# EAGLE board Power_Distro_PCB (EAGLE 8.3.2)

Size 160 x 100 mm. Coordinates in mm from the lower left corner, seen from the top.
Outline: 0,0 160,0 160,100 0,100 0,0
Copper layers (1*16): Top 0.035mm / dielectric 1.5mm / Bottom 0.035mm
Design rules "default": minimum track width 6mil, minimum drill 0.35mm, track to track 6mil, track to pad 6mil, pad to pad 6mil, via to via 6mil, smd to smd 6mil, copper to edge 40mil, drill to drill 6mil, minimum pad ring 10mil, minimum via ring 8mil, stop-mask expansion 4mil, vias tented up to drill 0mil, thermal gap 10mil
Net classes: 0 default: width 0.025 mm, drill 0.254 mm, clearance 0.254 mm

## Footprints (pad centres in the part's own frame; a part is rotated, then mirrored left to right if it is on the bottom)
SML1206 = smd 1.5 x 1.5: A 1.75,0; C -1.75,0
C1206 = smd 1.6 x 1.8: 1 -1.4,0; 2 1.4,0
70553-02 = drill 1.092 long: 1 -1.27,-7.62; 2 1.27,-7.62
TE5 = drill 1.016 long: 1 -2.54,0; 2 2.54,0
5566-2 = drill 1.4 square: 1 0,-2.75; 2 0,2.75 | hole 3: 4.7,2.29; -4.7,2.29
R1206 = smd 1.6 x 1.803: 1 -1.422,0; 2 1.422,0
DO-214AC = smd 2.083 x 1.778: 1 -2.184,0; 2 2.184,0
DO-214AA = smd 1.702 x 2.184: 1 -1.93,0 | smd 1.714 x 2.184: 2 1.93,0
TO-263-3 = smd 1.524 x 4.318: 1 -2.54,-7.62; 2 0,-7.62; 3 2.54,-7.62 | smd 11.176 x 9.906: 4 0,1.524

## Placement (x,y rotation side)
3.3V_IND  GREEN  [SML1206]  -78.74,-22.86 0 top  (outside the outline)
5V_IND  GREEN  [SML1206]  -78.74,-27.94 0 top  (outside the outline)
12V_HI_IND  GREEN  [SML1206]  -78.74,-38.1 0 top  (outside the outline)
12V_LO_IND  GREEN  [SML1206]  -78.74,-33.02 0 top  (outside the outline)
C1  10uF  [C1206]  -81.28,-198.12 0 top  (outside the outline)
C2  10uF  [C1206]  -81.28,-204.47 0 top  (outside the outline)
C3  10uF  [C1206]  -81.28,-210.82 0 top  (outside the outline)
C4  10uF  [C1206]  -81.28,-217.17 0 top  (outside the outline)
C5  10uF  [C1206]  -81.28,-223.52 0 top  (outside the outline)
C6  10uF  [C1206]  -81.28,-229.87 0 top  (outside the outline)
C7  10uF  [C1206]  -81.28,-236.22 0 top  (outside the outline)
C8  10uF  [C1206]  -81.28,-242.57 0 top  (outside the outline)
C9  10uF  [C1206]  -81.28,-248.92 0 top  (outside the outline)
C10  10uF  [C1206]  -81.28,-255.27 0 top  (outside the outline)
C11  10uF  [C1206]  -81.28,-261.62 0 top  (outside the outline)
C12  10uF  [C1206]  -81.28,-267.97 0 top  (outside the outline)
C13  10uF  [C1206]  -81.28,-274.32 0 top  (outside the outline)
C14  10uF  [C1206]  -81.28,-280.67 0 top  (outside the outline)
CPU_OUT  C-GRID-02-70553  [70553-02]  -31.75,34.29 0 top  (outside the outline)
ENCODER_OUT  C-GRID-02-70553  [70553-02]  -44.45,34.29 0 top  (outside the outline)
F1  [TE5]  -58.42,67.31 0 top  (outside the outline)
F2  24V, 15A  [TE5]  -17.78,74.93 0 top  (outside the outline)
F3  [TE5]  -27.94,74.93 0 top  (outside the outline)
F4  [TE5]  -38.1,74.93 0 top  (outside the outline)
F5  [TE5]  -48.26,74.93 0 top  (outside the outline)
LIDAR_OUT  C-GRID-02-70553  [70553-02]  -57.15,34.29 0 top  (outside the outline)
MOTOR_OUT  5566-2  [5566-2]  -35.56,54.61 0 top  (outside the outline)
PWR_IN  5566-2  [5566-2]  -48.26,54.61 0 top  (outside the outline)
PWR_IN_IND  RED  [SML1206]  -78.74,-17.78 0 top  (outside the outline)
R1  47  [R1206]  -80.01,-76.2 0 top  (outside the outline)
R2  47  [R1206]  -80.01,-82.55 0 top  (outside the outline)
R3  47  [R1206]  -80.01,-88.9 0 top  (outside the outline)
R4  47  [R1206]  -80.01,-95.25 0 top  (outside the outline)
R6  47  [R1206]  -80.01,-107.95 0 top  (outside the outline)
TVS_1  26V_TVS  [DO-214AC]  -60.96,49.53 0 top  (outside the outline)
TVS_2  SMBJ3V3_TVSSMB  [DO-214AA]  -29.21,66.04 0 top  (outside the outline)
TVS_3  SMAJ5.0_TVSSMA  [DO-214AC]  -39.37,66.04 0 top  (outside the outline)
TVS_4  PRSMA16_TVS  [DO-214AC]  -49.53,66.04 0 top  (outside the outline)
TVS_5  SMBJ3V3_TVSSMB  [DO-214AA]  -105.41,-279.4 0 top  (outside the outline)
TVS_6  SMAJ5.0_TVSSMA  [DO-214AC]  -101.6,-289.56 0 top  (outside the outline)
TVS_7  PRSMA16_TVS  [DO-214AC]  -101.6,-297.18 0 top  (outside the outline)
TVS_8  26V_TVS  [DO-214AC]  -101.6,-304.8 0 top  (outside the outline)
VREG_1  29300-3.3WU  [TO-263-3]  -53.34,10.16 0 top  (outside the outline)
VREG_2  29300-5.0WU  [TO-263-3]  -66.04,10.16 0 top  (outside the outline)
VREG_3  29300-12WU  [TO-263-3]  -19.05,35.56 0 top  (outside the outline)
VREG_4  MIC29300-3.3WU  [TO-263-3]  -64.77,-57.15 0 top  (outside the outline)
VREG_5  MIC29300-3.3WU  [TO-263-3]  -64.77,-123.19 0 top  (outside the outline)
VREG_6  MIC29300-3.3WU  [TO-263-3]  -64.77,-151.13 0 top  (outside the outline)
VREG_7  MIC2900-3.3WU  [TO-263-3]  -64.77,-179.07 0 top  (outside the outline)
WIFI_OUT  C-GRID-02-70553  [70553-02]  -19.05,58.42 0 top  (outside the outline)

## Library data of the parts
3.3V_IND 5V_IND 12V_HI_IND 12V_LO_IND PWR_IN_IND = led
C1-C14 R1-R4 R6 = resistor
CPU_OUT ENCODER_OUT LIDAR_OUT WIFI_OUT = con-molex; OC_FARNELL: unknown; OC_NEWARK: unknown
F1-F5 = fuse; OC_FARNELL: unknown; OC_NEWARK: unknown
MOTOR_OUT PWR_IN = con-molex; OC_FARNELL: 1822072; OC_NEWARK: unknown
TVS_1-TVS_8 VREG_1-VREG_7 = POWER_DISTRO

## Nets
3.3V_REG: CPU_OUT.1 R1.2 TVS_5.1
5V_REG: C9.2 ENCODER_OUT.1 TVS_6.1 VREG_5.1 WIFI_OUT.1
12V_REG: C11.2 LIDAR_OUT.1 TVS_7.1 VREG_6.1
12V_REG_MOTOR: C13.2 VREG_7.1
24V_REG: C1.2 C3.2 C5.2 C7.2 F2.1 TVS_1.1 TVS_8.1 VREG_1.1 VREG_2.1 VREG_3.1 VREG_4.1
24V_REG_MOTOR: F2.2 MOTOR_OUT.1
GND: 3.3V_IND.C 5V_IND.C 12V_HI_IND.C 12V_LO_IND.C C1.1 C2.1 C3.1 C4.1 C5.1 C6.1 C7.1 C8.1 C9.1 C10.1 C11.1 C12.1 C13.1 C14.1 CPU_OUT.2 ENCODER_OUT.2 LIDAR_OUT.2 MOTOR_OUT.2 PWR_IN.2 PWR_IN_IND.C TVS_1.2 TVS_2.2 TVS_3.2 TVS_4.2 VREG_1.2 VREG_1.4 VREG_2.2 VREG_2.4 VREG_3.2 VREG_3.4 VREG_4.2 VREG_4.4 VREG_5.2 VREG_5.4 VREG_6.2 VREG_6.4 VREG_7.2 VREG_7.4 WIFI_OUT.2
N$1: F1.2 TVS_8.2
N$2: 3.3V_IND.A R1.1
N$3: F1.1
N$4: F3.2 TVS_5.2
N$5: 5V_IND.A R2.1
N$6: C2.2 F3.1 TVS_2.1 VREG_1.3
N$7: C4.2 F4.1 TVS_3.1 VREG_2.3
N$8: 12V_LO_IND.A R3.1
N$9: 12V_HI_IND.A R4.1
N$10: C6.2 F5.1 TVS_4.1 VREG_3.3
N$11: F4.2 TVS_6.2
N$12: PWR_IN_IND.A R6.1
N$13: C8.2 R6.2 VREG_4.3
N$14: C10.2 R2.2 VREG_5.3
N$15: C12.2 R3.2 VREG_6.3
N$16: C14.2 R4.2 VREG_7.3
N$17: F5.2 TVS_7.2

## Tracks (layer width: path | path; a pad name or v marks a point on that pad's centre or on a via)
3.3V_REG  (2 unrouted)
5V_REG  (4 unrouted)
12V_REG  (3 unrouted)
12V_REG_MOTOR  (1 unrouted)
24V_REG  (10 unrouted)
24V_REG_MOTOR  (1 unrouted)
GND  (42 unrouted)
N$1  (1 unrouted)
N$2  (1 unrouted)
N$4  (1 unrouted)
N$5  (1 unrouted)
N$6  (3 unrouted)
N$7  (3 unrouted)
N$8  (1 unrouted)
N$9  (1 unrouted)
N$10  (3 unrouted)
N$11  (1 unrouted)
N$12  (1 unrouted)
N$13  (2 unrouted)
N$14  (2 unrouted)
N$15  (2 unrouted)
N$16  (2 unrouted)
N$17  (1 unrouted)